# EAGLE board Stepper (EAGLE 9.6.2)
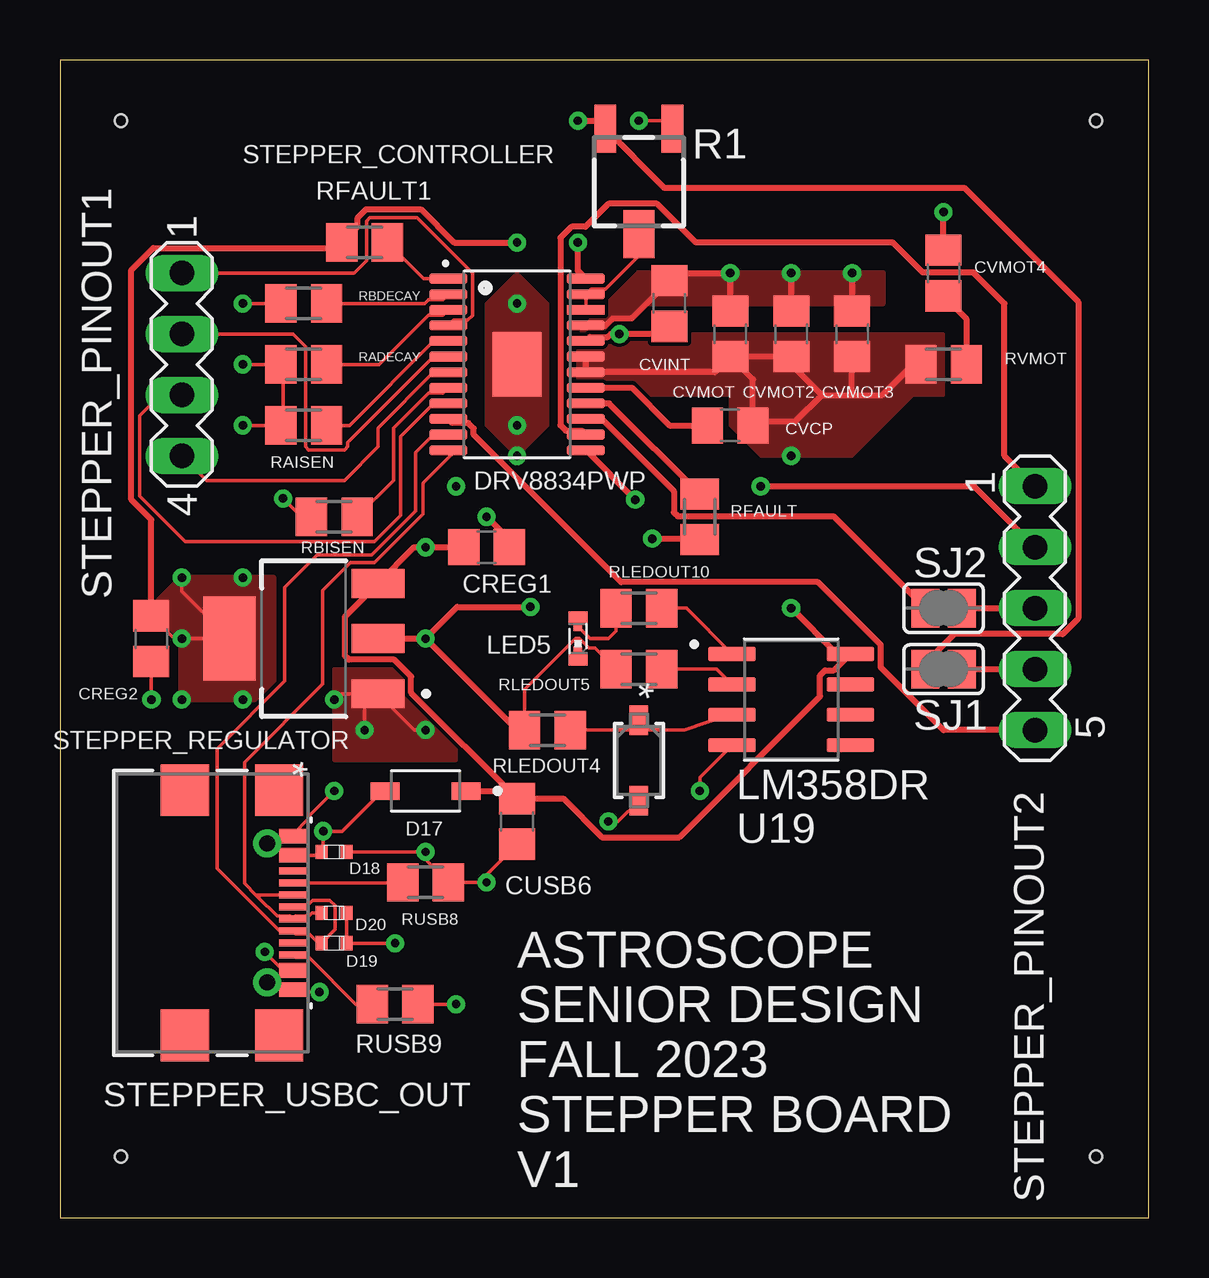
[diagram p0: board, top side]
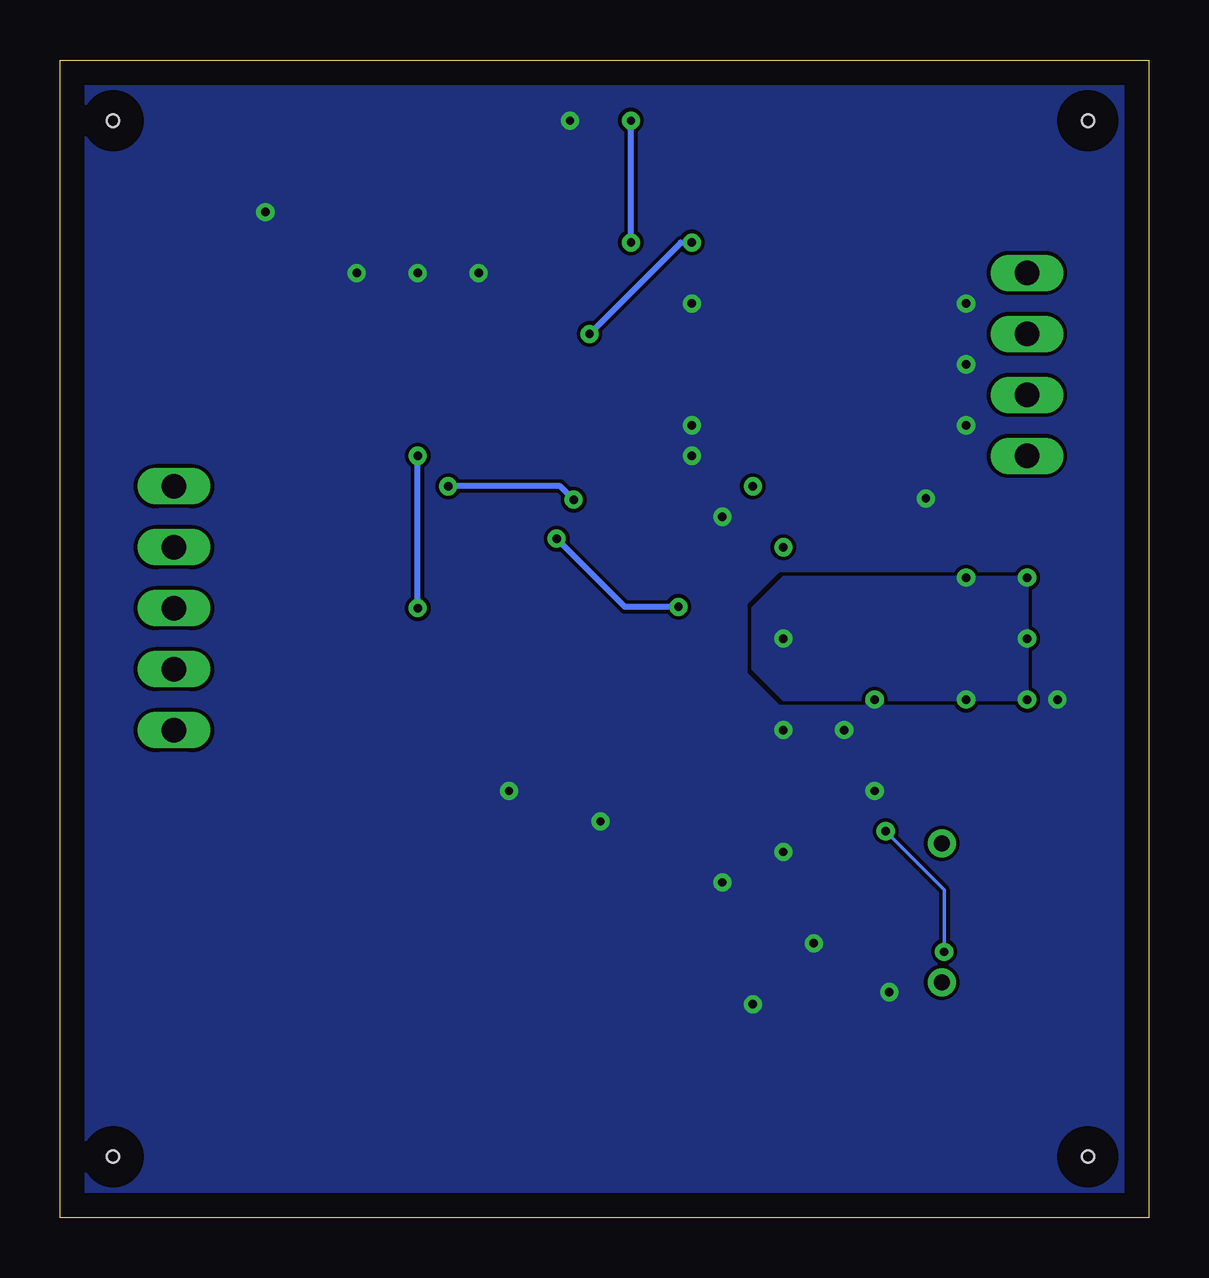
[diagram p1: board, bottom side, seen from below]

Size 45.39 x 48.25 mm. Coordinates in mm from the lower left corner, seen from the top.
Outline: 0,0 45.39,0 45.39,48.25 0,48.25 0,0
Copper layers (1*16): Top 0.035mm / dielectric 1.5mm / Bottom 0.035mm
Design rules "default": minimum track width 6mil, minimum drill 0.35mm, track to track 6mil, track to pad 6mil, pad to pad 6mil, via to via 6mil, smd to smd 6mil, copper to edge 40mil, drill to drill 6mil, minimum pad ring 10mil, minimum via ring 8mil, stop-mask expansion 4mil, vias tented up to drill 0mil, thermal gap 10mil
Holes 0.51 mm at 43.18,2.54 2.54,2.54 2.54,45.72 43.18,45.72

## Footprints (pad centres in the part's own frame; a part is rotated, then mirrored left to right if it is on the bottom)
C0805 = smd 1.3 x 1.5: 1 -0.95,0; 2 0.95,0
SOD3715X145N = smd 1.21 x 0.73: A 1.68,0; C -1.68,0
MBTB-D-SOD-923F-IMP-0402 = smd 0.5 x 0.6: 1 -0.525,0; 2 0.525,0
SMARTLED-TTW = smd 0.8 x 0.5: A 0,-0.875; C 0,0.875 | smd 0.35 x 0.35: A@1 0,-0.5; C@1 0,0.5
3223G = smd 2 x 0.9: 1 -2.2,1.4; 3 -2.2,-1.4 | smd 2 x 1.3: 2 2.2,0
M0805 = smd 1.3 x 1.6: 1 -0.95,0; 2 0.95,0
SJ = smd 1.168 x 1.6: 1 -0.762,0; 2 0.762,0
SOP65P640X120-25N = smd 1.57 x 0.41: 1 -2.87,3.575; 2 -2.87,2.925; 3 -2.87,2.275; 4 -2.87,1.625; 5 -2.87,0.975; 6 -2.87,0.325; 7 -2.87,-0.325; 8 -2.87,-0.975; 9 -2.87,-1.625; 10 -2.87,-2.275; 11 -2.87,-2.925; 12 -2.87,-3.575; 13 2.87,-3.575; 14 2.87,-2.925; 15 2.87,-2.275; 16 2.87,-1.625; 17 2.87,-0.975; 18 2.87,-0.325; 19 2.87,0.325; 20 2.87,0.975; 21 2.87,1.625; 22 2.87,2.275; 23 2.87,2.925; 24 2.87,3.575 | smd 2.025 x 2.68: 25 0,0
MA04-1 = drill 1.016 long: 1 -3.81,0; 2 -1.27,0; 3 1.27,0; 4 3.81,0
MA05-1 = drill 1.016 long: 1 -5.08,0; 2 -2.54,0; 3 0,0; 4 2.54,0; 5 5.08,0
SOT230P700X185-4N = smd 2.2 x 1.2: 1 -3.1,2.3; 2 -3.1,0; 3 -3.1,-2.3 | smd 2.2 x 3.5: 4 3.1,0
USB4110-GF-A_GCT = drill 0.66 pad 0.66: 13 -2.896,2.286; 14 2.896,2.286 | smd 2.159 x 2.007: 15 -5.11,2.788; 16 5.11,2.788; 17 -5.11,-1.142; 18 5.11,-1.142 | smd 0.61 x 1.143: A1-B12 -3.2,3.363; A4-B9 -2.4,3.363; A9-B4 2.4,3.363; A12-B1 3.2,3.363 | smd 0.305 x 1.143: A5 -1.25,3.363; A6 -0.25,3.363; A7 0.25,3.363; A8 1.25,3.363; B5 1.75,3.363; B6 0.75,3.363; B7 -0.75,3.363; B8 -1.75,3.363
SOD-123_ONS = smd 1.219 x 0.762: 1 -1.676,0; 2 1.676,0
SOIC127P599X175-8N = smd 1.97 x 0.6: 1 -2.47,1.905; 2 -2.47,0.635; 3 -2.47,-0.635; 4 -2.47,-1.905; 5 2.47,-1.905; 6 2.47,-0.635; 7 2.47,0.635; 8 2.47,1.905

## Placement (x,y rotation side)
CREG1  10uF  [C0805]  17.78,27.94 0 top
CREG2  22uF  [C0805]  3.81,24.13 270 top
CUSB6  10uF  [C0805]  19.05,16.51 270 top
CVCP  0.01uF  [C0805]  27.94,33.02 180 top
CVINT  4.7uF  [C0805]  25.4,38.1 90 top
CVMOT  10uF  [C0805]  27.94,36.83 270 top
CVMOT2  0.1uF  [C0805]  30.48,36.83 270 top
CVMOT3  0.1uF  [C0805]  33.02,36.83 270 top
CVMOT4  10uF  [C0805]  36.83,39.37 270 top
D17  1N5819HW-7-F  [SOD3715X145N]  15.24,17.78 180 top
D18  CPDQ5V0-HF  [MBTB-D-SOD-923F-IMP-0402]  11.43,15.24 180 top
D19  CPDQ5V0-HF  [MBTB-D-SOD-923F-IMP-0402]  11.43,11.43 180 top
D20  CPDQ5V0-HF  [MBTB-D-SOD-923F-IMP-0402]  11.43,12.7 180 top
LED5  [SMARTLED-TTW]  21.59,24.13 0 top
R1  10k  [3223G]  24.13,43.18 270 top
RADECAY  47k  [M0805]  10.16,35.56 180 top
RAISEN  0.1  [M0805]  10.16,33.02 180 top
RBDECAY  47k  [M0805]  10.16,38.1 180 top
RBISEN  0.1  [M0805]  11.43,29.21 180 top
RFAULT  1.5k  [M0805]  26.67,29.21 270 top
RFAULT1  10k  [M0805]  12.7,40.64 0 top
RLEDOUT4  10k  [M0805]  20.32,20.32 180 top
RLEDOUT5  10k  [M0805]  24.13,22.86 180 top
RLEDOUT10  2.2k  [M0805]  24.13,25.4 0 top
RUSB8  5.1k  [M0805]  15.24,13.97 0 top
RUSB9  5.1k  [M0805]  13.97,8.89 0 top
RVMOT  1  [M0805]  36.83,35.56 180 top
SJ1  [SJ]  36.83,22.86 180 top
SJ2  [SJ]  36.83,25.4 180 top
STEPPER_CONTROLLER  DRV8834PWP  [SOP65P640X120-25N]  19.05,35.56 0 top
STEPPER_PINOUT1  [MA04-1]  5.08,35.56 270 top
STEPPER_PINOUT2  [MA05-1]  40.64,25.4 270 top
STEPPER_REGULATOR  AZ1117IH-3.3TRG1  [SOT230P700X185-4N]  10.16,24.13 180 top
STEPPER_USBC_OUT  USB4110-GF-A  [USB4110-GF-A_GCT]  6.35,12.7 270 top
U16  MMSZ5225BT1G  [SOD-123_ONS]  24.13,19.05 270 top
U19  LM358DR  [SOIC127P599X175-8N]  30.48,21.59 0 top

## Library data of the parts
CREG1 CREG2 CUSB6 CVCP CVINT CVMOT CVMOT2-CVMOT4 = rcl; SPICEPREFIX: C
D17 = 1N5819HW-7-F; AVAILABILITY: In Stock; CHECK_PRICES: https://www.snapeda.com/parts/1N5819HW-7-F/Diodes+Inc./view-part/?ref=eda; DESCRIPTION: Diode Schottky 1A 40V SOD123 | Diodes Inc 1N5819HW-7-F; MF: Diodes Inc.; MP: 1N5819HW-7-F; PACKAGE: SOD-123 Fairchild Semiconductor; PRICE: None; PURCHASE-URL: https://www.snapeda.com/api/url_track_click_mouser/?unipart_id=42272&manufacturer=Diodes Inc.&part_name=1N5819HW-7-F&search_term=1n5819hw-7-f; SNAPEDA_LINK: https://www.snapeda.com/parts/1N5819HW-7-F/Diodes+Inc./view-part/?ref=snap
D18-D20 = CPDQ5V0-HF; AVAILABILITY: In Stock; CHECK_PRICES: https://www.snapeda.com/parts/CPDQ5V0-HF/Comchip+Technology/view-part/?ref=eda; DESCRIPTION: 18.6V Clamp 9.4A (8/20µs) Ipp Tvs Diode Surface Mount 0402/SOD-923F; MF: Comchip Technology; MP: CPDQ5V0-HF; PACKAGE: 0402 Comchip; PRICE: None; PURCHASE-URL: https://www.snapeda.com/api/url_track_click_mouser/?unipart_id=809934&manufacturer=Comchip Technology&part_name=CPDQ5V0-HF&search_term=cpdq5v0-hf; SNAPEDA_LINK: https://www.snapeda.com/parts/CPDQ5V0-HF/Comchip+Technology/view-part/?ref=snap
LED5 = adafruit
R1 = pot
RADECAY RAISEN RBDECAY RBISEN RFAULT RFAULT1 RLEDOUT4 RLEDOUT5 RLEDOUT10 RUSB8 RUSB9 RVMOT = rcl; SPICEPREFIX: R
SJ1 SJ2 = jumper
STEPPER_CONTROLLER = DRV8834PWP; AVAILABILITY: In Stock; DESCRIPTION: 11-V, 1.5-A, dual H-bridge or stepper motor driver with 1/32 microstep indexer; MF: Texas Instruments; MP: DRV8834PWP; PACKAGE: HTSSOP-24 Texas Instruments; PRICE: None; PURCHASE-URL: https://pricing.snapeda.com/search?q=DRV8834PWP&ref=eda
STEPPER_PINOUT1 STEPPER_PINOUT2 = con-lstb; OC_FARNELL: unknown; OC_NEWARK: unknown
STEPPER_REGULATOR = AZ1117IH-3.3TRG1; AVAILABILITY: In Stock; CHECK_PRICES: https://www.snapeda.com/parts/AZ1117IH-3.3TRG1/Diodes+Inc./view-part/?ref=eda; DESCRIPTION: Linear Voltage Regulator IC Positive Fixed 1 Output 1A SOT-223-3; MF: Diodes Inc.; MP: AZ1117IH-3.3TRG1; PACKAGE: SOT-223 Diodes Inc.; PRICE: None; PURCHASE-URL: https://www.snapeda.com/api/url_track_click_mouser/?unipart_id=490259&manufacturer=Diodes Inc.&part_name=AZ1117IH-3.3TRG1&search_term=az1117ih-3.3trg1; SNAPEDA_LINK: https://www.snapeda.com/parts/AZ1117IH-3.3TRG1/Diodes+Inc./view-part/?ref=snap
STEPPER_USBC_OUT = USB4110-GF-A; COPYRIGHT: Copyright (C) 2023 Ultra Librarian. All rights reserved.; MANUFACTURER_PART_NUMBER: USB4110-GF-A; MFR_NAME: Global Connector Technology
U16 = MMSZ5225BT1G; COPYRIGHT: Copyright (C) 2023 Ultra Librarian. All rights reserved.; MANUFACTURER_PART_NUMBER: MMSZ5225BT1G; MFR_NAME: onsemi
U19 = LM358DR; AVAILABILITY: In Stock; CHECK_PRICES: https://www.snapeda.com/parts/LM358DR/Texas+Instruments/view-part/?ref=eda; DESCRIPTION: Dual, 30-V, 700-kHz operational amplifier; MF: Texas Instruments; MP: LM358DR; PACKAGE: SOIC-8 Texas Instruments; PRICE: None; PURCHASE-URL: https://www.snapeda.com/api/url_track_click_mouser/?unipart_id=6639&manufacturer=Texas Instruments&part_name=LM358DR&search_term=lm358dr; SNAPEDA_LINK: https://www.snapeda.com/parts/LM358DR/Texas+Instruments/view-part/?ref=snap

## Nets
3.3VOUTUSB2: CREG2.1 CVINT.1 LED5.A@1 RFAULT1.1 RFAULT.2 RLEDOUT4.2 RLEDOUT5.2 STEPPER_CONTROLLER.20 STEPPER_REGULATOR.2 STEPPER_REGULATOR.4
5VOUTUSB2: CREG1.1 CUSB6.1 CVCP.1 CVMOT2.2 CVMOT3.2 CVMOT.2 D17.C RVMOT.2 STEPPER_CONTROLLER.18 STEPPER_CONTROLLER.19 STEPPER_REGULATOR.3 U19.8
GND: CREG1.2 CREG2.2 CUSB6.2 CVINT.2 CVMOT2.1 CVMOT3.1 CVMOT4.1 CVMOT.1 D18.1 D19.1 D20.1 R1.1 RADECAY.2 RAISEN.2 RBDECAY.2 RBISEN.2 RUSB8.2 RUSB9.2 STEPPER_CONTROLLER.21 STEPPER_CONTROLLER.25 STEPPER_REGULATOR.1 STEPPER_USBC_OUT.A1-B12 STEPPER_USBC_OUT.A12-B1 U16.2 U19.4
GPIO8M: D19.2 STEPPER_CONTROLLER.11 STEPPER_USBC_OUT.A6 STEPPER_USBC_OUT.B6
GPIO9M: D20.2 STEPPER_CONTROLLER.12 STEPPER_USBC_OUT.A7 STEPPER_USBC_OUT.B7
N$20: CVMOT4.2 RVMOT.1
N$21: RBISEN.1 STEPPER_CONTROLLER.8
N$23: RAISEN.1 STEPPER_CONTROLLER.5
N$24: RBDECAY.1 STEPPER_CONTROLLER.2
N$25: RADECAY.1 STEPPER_CONTROLLER.3
N$27: RFAULT.1 STEPPER_CONTROLLER.16
N$28: STEPPER_CONTROLLER.4 STEPPER_PINOUT1.1
N$29: STEPPER_CONTROLLER.6 STEPPER_PINOUT1.2
N$30: STEPPER_CONTROLLER.9 STEPPER_PINOUT1.3
N$31: STEPPER_CONTROLLER.7 STEPPER_PINOUT1.4
N$32: CVCP.2 STEPPER_CONTROLLER.17
N$33: R1.2 STEPPER_CONTROLLER.22 STEPPER_CONTROLLER.23
N$34: SJ1.1 STEPPER_PINOUT2.4
N$35: SJ2.1 STEPPER_PINOUT2.3
N$36: SJ2.2 STEPPER_CONTROLLER.15
N$37: STEPPER_CONTROLLER.14 STEPPER_PINOUT2.1
N$38: STEPPER_CONTROLLER.13 STEPPER_PINOUT2.2
N$72: RUSB8.1 STEPPER_USBC_OUT.A5
N$73: RUSB9.1 STEPPER_USBC_OUT.B5
N$82: RLEDOUT4.1 U16.1 U19.3
N$83: RLEDOUT5.1 U19.2
N$84: RLEDOUT10.2 U19.1
N$87: U19.6
N$88: LED5.C@1 RLEDOUT10.1
N$89: U19.5
N$90: STEPPER_CONTROLLER.10 STEPPER_PINOUT2.5
SLP: RFAULT1.2 STEPPER_CONTROLLER.1
VBUS22: D17.A D18.2 STEPPER_USBC_OUT.A4-B9 STEPPER_USBC_OUT.A9-B4
VREF: R1.3 SJ1.2 STEPPER_CONTROLLER.24

## Tracks (layer width: path | path; a pad name or v marks a point on that pad's centre or on a via)
3.3VOUTUSB2  (via drill 0.35)
  Top 0.152: 19.05,20.32 RLEDOUT4.2 19.37,22.01 21.49,24.13 21.59,24.13 | RLEDOUT5.2 22.31,23.73 22.05,23.73 21.66,24.13 21.59,24.13 | 26.67,28.3 RFAULT.2 | STEPPER_REGULATOR.4 v5.08,24.13 4.76,24.13 CREG2.1 | STEPPER_REGULATOR.4 5.08,26.11 v5.08,26.67 | STEPPER_REGULATOR.4 6.35,24.84 6.35,25.4 | STEPPER_REGULATOR.4 7.06,24.84 7.62,25.4 | LED5.A@1 21.59,24.13
  Top 0.254: v15.24,24.13 16.56,25.45 v19.61,25.45 | v15.24,24.13 19.05,20.32 | CREG2.1 3.81,29.08 2.97,29.92 2.97,39.5 3.89,40.41 11.52,40.41 RFAULT1.1 12.42,41.31 12.42,41.68 12.76,42.02 15.04,42.02 16.43,40.64 v19.05,40.64 | STEPPER_REGULATOR.2 v15.24,24.13 | STEPPER_CONTROLLER.20 22.09,36.7 22.83,36.7 22.96,36.83 v23.32,36.83 25.08,36.83 CVINT.1 | v24.69,28.3 26.63,28.3 RFAULT.2
  Bottom 0.254: v23.32,36.83 19.51,40.64 v19.05,40.64 | v19.61,25.45 21.84,25.45 v24.69,28.3
  other vias: 5.08,21.59 7.62,21.59 7.62,26.67
  pour Bottom (no thermals): 5.08,21.59 5.08,26.67 15.24,26.67 16.51,25.4 16.51,22.86 15.24,21.59
  pour Top (no thermals): 5.08,26.67 8.89,26.67 8.89,21.59 5.08,21.59 5.08,24.13 3.81,25.4
5VOUTUSB2  (via drill 0.35)
  Top 0.152: 35.56,35.88 RVMOT.2 | 29.05,33.18 CVCP.1
  Top 0.254: RVMOT.2 35.56,35.56 34.29,34.29 33.02,34.29 | 33.02,34.29 CVMOT3.2 | 31.75,34.29 30.48,35.56 CVMOT2.2 CVMOT.2 | 31.75,34.29 30.64,33.18 29.05,33.18 | CVCP.1 28.89,34.93 CVMOT.2 | CVMOT.2 27.29,35.23 STEPPER_CONTROLLER.18 STEPPER_CONTROLLER.19 | 31.75,34.29 33.02,34.29 | D17.C 18.73,17.78 CUSB6.1 | CUSB6.1 14.64,21.87 14.64,22.55 13.93,23.25 12.04,23.25 11.88,23.41 11.88,25.05 STEPPER_REGULATOR.3 14.77,27.94 v15.24,27.94 CREG1.1 | CUSB6.1 20.98,17.46 22.59,15.85 25.81,15.85 31.69,21.72 31.69,22.6 31.89,22.8 32.26,22.8 U19.8 32.39,23.49 v30.48,25.4
  Bottom 0.254: v30.48,25.4 v30.48,31.75
  pour Top (rank 2, no thermals): 29.21,31.75 33.02,31.75 35.56,34.29 36.83,34.29 36.83,36.83 21.59,36.83 21.59,34.29 27.94,34.29 27.94,33.02
GND  (via drill 0.35)
  Top 0.152: D18.1 v15.24,15.24 15.24,14.92 RUSB8.2 v17.78,13.97 17.78,14.29 CUSB6.2 | D20.1 D19.1 v13.97,11.43 | RUSB9.2 v16.51,8.89 | v24.13,45.72 25.53,45.72 R1.1 | RBDECAY.2 v7.62,38.1 | v7.62,35.56 RADECAY.2 9.3,35.46 9.3,33.02 RAISEN.2 v7.62,33.02 | U16.2 23.27,16.51 v22.86,16.51 | RBISEN.2 10.06,29.21 v9.3,29.97 | v10.82,9.4 9.75,9.4 STEPPER_USBC_OUT.A12-B1 | U19.4 26.67,18.34 v26.67,17.78 | v11.43,21.59 11.67,21.83 12.7,21.83 | 12.7,21.83 STEPPER_REGULATOR.1 14.77,20.32 v15.24,20.32 | v12.7,20.32 12.7,21.83 | CREG2.2 v3.81,21.59 | v11.43,17.78 10.37,16.72 10.37,16.64 9.71,15.98 STEPPER_USBC_OUT.A1-B12
  Top 0.254: CVMOT4.1 v36.83,41.91 | CVMOT2.1 v30.48,39.37 | CVMOT.1 v27.94,39.37 25.72,39.37 CVINT.2 23.84,37.49 23.04,37.49 22.74,37.19 STEPPER_CONTROLLER.21 | v33.02,39.37 CVMOT3.1 | v17.78,29.21 18.73,28.26 CREG1.2
  other vias: 19.05,38.1 19.05,33.02 19.05,31.75
  pour Bottom (rank 2): 0,0 45.72,0 45.72,48.26 0,48.26
  pour Top (no thermals): 17.78,33.02 19.05,31.75 20.32,33.02 20.32,38.1 19.05,39.37 17.78,38.1
  pour Top (no thermals): 11.43,21.59 11.43,22.86 13.97,22.86 16.51,20.32 16.51,19.05 11.43,19.05
  pour Top (no thermals): 34.29,38.1 24.13,38.1 22.86,36.83 21.59,36.83 24.13,39.37 34.29,39.37
GPIO8M
  Top 0.152: STEPPER_USBC_OUT.A6 10.26,12.95 10.54,13.23 11.25,13.23 11.48,13 11.48,12 D19.2 10.78,11.43 10.38,11.83 9.83,11.83 STEPPER_USBC_OUT.B6 9.17,11.95 6.55,14.56 6.55,19.54 9.37,22.36 9.37,26.27 10.71,27.61 12.98,27.61 14.83,29.46 14.83,31.88 15.58,32.63 STEPPER_CONTROLLER.11
GPIO9M
  Top 0.152: D20.2 10.51,12.7 10.38,12.57 9.83,12.57 STEPPER_USBC_OUT.A7 9.59,12.57 9.05,12.57 8.27,13.35 | STEPPER_CONTROLLER.12 16.51,31.98 15.14,30.61 15.14,29.33 13.11,27.3 12.11,27.3 10.94,26.14 10.94,22.23 7.69,18.98 7.69,13.92 8.17,13.45 | 8.27,13.35 8.17,13.45 | 8.27,13.35 8.37,13.45 STEPPER_USBC_OUT.B7 8.17,13.45
N$1  (via drill 0.35)
  other vias: 16.51,30.48
N$20
  Top 0.254: CVMOT4.2 37.78,37.47 RVMOT.1
N$21
  Top 0.152: RBISEN.1 13.9,30.73 13.9,32.9 15.36,34.37 15.96,34.37 STEPPER_CONTROLLER.8
N$23
  Top 0.152: RAISEN.1 12.07,33.02 15.58,36.53 STEPPER_CONTROLLER.5
N$24
  Top 0.152: STEPPER_CONTROLLER.2 15.96,38.27 15.36,38.27 15.2,38.1 RBDECAY.1
N$25
  Top 0.152: RADECAY.1 13.31,35.56 15.36,37.62 15.96,37.62 STEPPER_CONTROLLER.3
N$27
  Top 0.254: RFAULT.1 22.89,33.94 STEPPER_CONTROLLER.16
N$28
  Top 0.152: STEPPER_CONTROLLER.4 16.4,37.4 17,37.4 17.19,37.6 17.19,39.37 14.89,41.67 12.9,41.67 12.77,41.53 12.77,39.89 12.25,39.37 STEPPER_PINOUT1.1
N$29
  Top 0.152: STEPPER_CONTROLLER.6 15.58,35.88 11.99,32.29 11.99,32.12 11.86,31.99 10.36,31.99 10.23,32.12 10.23,36.31 9.71,36.83 STEPPER_PINOUT1.2
N$30
  Top 0.152: STEPPER_CONTROLLER.9 15.58,33.94 14.2,32.55 14.2,29.26 13.12,28.18 5.22,28.18 3.33,30.07 3.33,33.43 4.19,34.29 STEPPER_PINOUT1.3
N$31
  Top 0.152: STEPPER_CONTROLLER.7 15.58,35.23 13.26,32.91 13.26,32.12 11.86,30.72 6.11,30.72 STEPPER_PINOUT1.4
N$32
  Top 0.254: STEPPER_CONTROLLER.17 23.83,34.59 25.4,33.02 CVCP.2
N$33
  Top 0.152: STEPPER_CONTROLLER.22 STEPPER_CONTROLLER.23 22.14,38.7 22.74,38.7 24.13,40.1 R1.2
N$34
  Top 0.254: SJ1.1 STEPPER_PINOUT2.4
N$35
  Top 0.254: SJ2.1 STEPPER_PINOUT2.3
N$36
  Top 0.254: STEPPER_CONTROLLER.15 22.59,33.28 25.59,30.28 25.59,29.39 25.75,29.23 32.24,29.23 SJ2.2
N$37
  Top 0.254: STEPPER_PINOUT2.1 39.37,31.75 39.37,38.1 38.08,39.39 35.96,39.39 34.71,40.64 26.51,40.64 24.9,42.26 22.86,42.26 21.9,41.3 21.32,41.3 20.86,40.84 20.86,33.03 21.08,32.8 21.75,32.8 STEPPER_CONTROLLER.14
N$38  (via drill 0.35)
  Top 0.254: v29.21,30.48 38.1,30.48 STEPPER_PINOUT2.2 | STEPPER_CONTROLLER.13 v23.98,29.93 v23.98,29.92
  Bottom 0.254: v23.98,29.92 24.54,30.48 v29.21,30.48
N$72
  Top 0.152: RUSB8.1 14.27,13.95 STEPPER_USBC_OUT.A5
N$73
  Top 0.152: STEPPER_USBC_OUT.B5 9.83,10.83 10.38,10.83 12.32,8.89 RUSB9.1
N$82
  Top 0.152: RLEDOUT4.1 23.72,20.32 U16.1 24.54,20.32 26.04,20.32 27.87,20.95 U19.3
N$83
  Top 0.152: U19.2 27.37,22.86 RLEDOUT5.1
N$84
  Top 0.152: RLEDOUT10.2 26.11,25.4 U19.1
N$88
  Top 0.152: LED5.C@1 22.09,24.13 22.86,24.13 23.18,24.45 RLEDOUT10.1
N$90
  Top 0.254: STEPPER_CONTROLLER.10 16.35,33.12 17.02,33.12 17.24,32.89 17.24,32.63 23.39,26.48 31.6,26.48 34.21,23.87 34.21,22.93 36.83,20.32 STEPPER_PINOUT2.5
SLP
  Top 0.152: STEPPER_CONTROLLER.1 15.15,39.13 RFAULT1.2
VBUS22  (via drill 0.35)
  Top 0.152: STEPPER_USBC_OUT.A4-B9 10.76,15.1 D18.2 10.97,15.31 v10.97,16.1 11.77,16.1 13.44,17.78 D17.A | v8.53,11.07 9.3,10.31 9.6,10.31 STEPPER_USBC_OUT.A9-B4
  Bottom 0.152: v8.53,11.07 8.53,13.66 v10.97,16.1
VREF  (via drill 0.35)
  Top 0.152: 22.62,45.48 R1.3
  Top 0.254: R1.3 25.18,42.93 37.69,42.93 42.44,38.17 42.44,24.97 41.8,24.32 37.27,24.32 36.07,23.12 SJ1.2 | STEPPER_CONTROLLER.24 21.59,39.46 v21.59,40.64 | v21.59,45.72 22.39,45.72 22.62,45.48
  Bottom 0.254: v21.59,40.64 v21.59,45.72

## Text on the board
tNames: ASTROSCOPE / SENIOR DESIGN / FALL 2023 / STEPPER BOARD / V1